# Altium PCB WheelLED_LIght_PcbS.PcbDoc
Units mil, origin at the board's own origin, x right, y up, seen from the top; angles counter-clockwise.
Board outline 1530.68 x 9620.08 mil, 2 copper layers (Top Layer, Bottom Layer); 44 components, 52 nets, 132 pads, 72 vias.
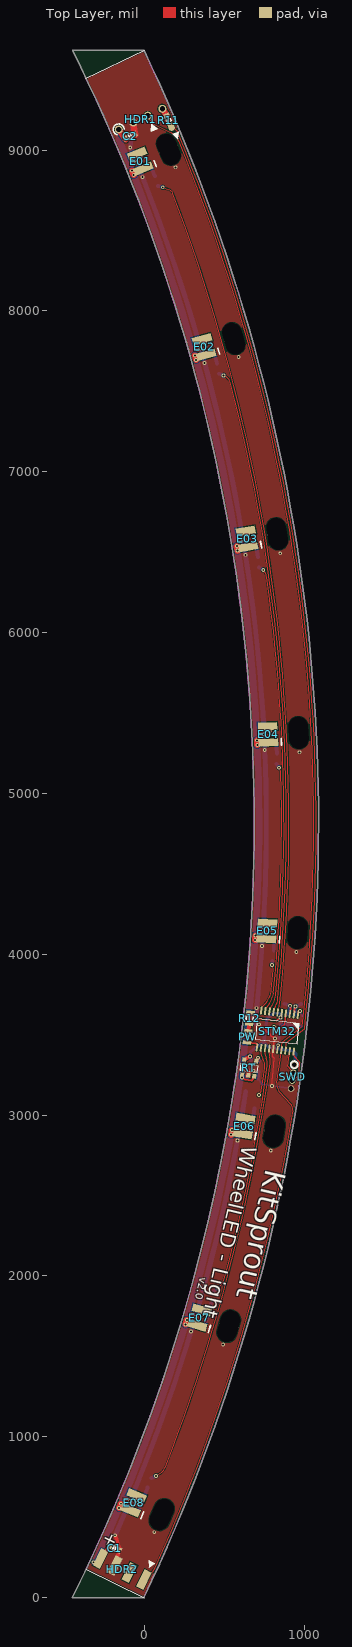
[diagram p0: Top Layer view]
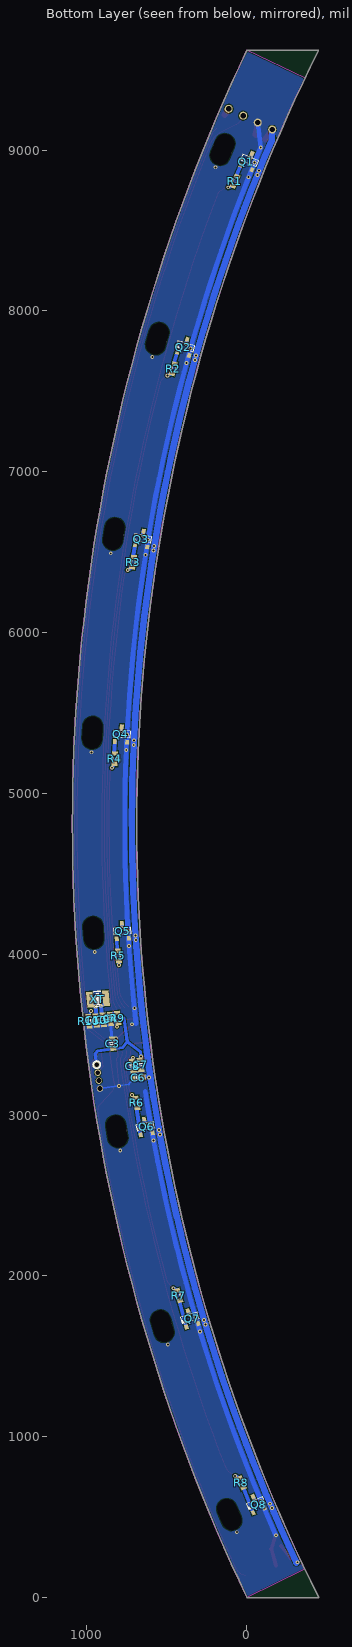
[diagram p1: Bottom Layer view, seen from below]
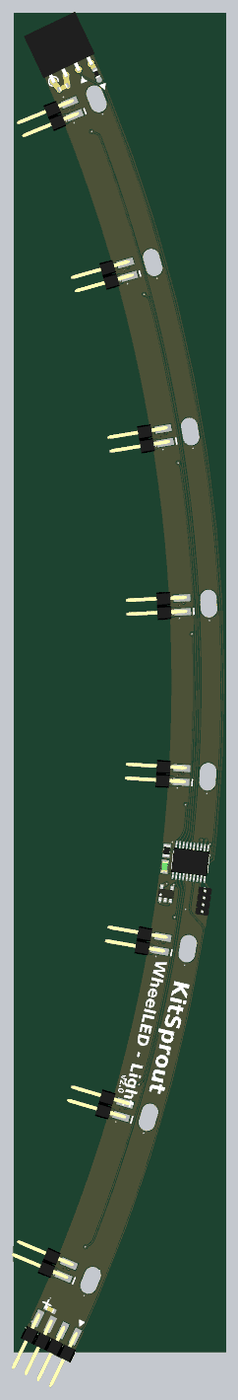
[diagram p2: 3D render of the assembled board from above, using the file's embedded part models]
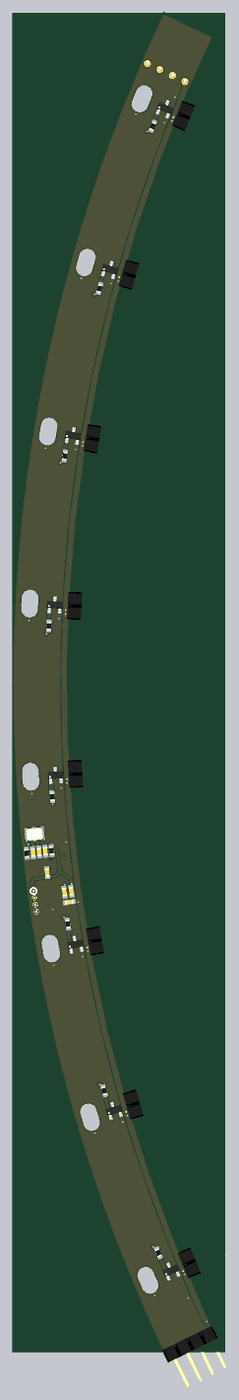
[diagram p3: 3D render of the assembled board from below, using the file's embedded part models]

## Layer stack, top to bottom
Top Solder: solder mask 0.4, Solder Resist, Dk 3.5
Top Layer: signal copper 1.4
Dielectric1: dielectric 12.6, FR-4, Dk 4.8
Bottom Layer: signal copper 1.4
Bottom Solder: solder mask 0.4, Solder Resist, Dk 3.5

## Board outline
-445.33,0 0,0 -0.49,0.23 ccw(c-10114.71,4810.89) 0.21,9620.08 0,9620 -444.55,9620 -444.53,9620.01 cw(c-10114.71,4810.89)

## Design rules (kind name [scope] priority, off if disabled: settings)
Clearance ClearancePolygon [InPolygon] p1: gap=6
Clearance [All] p2: gap=6
ComponentClearance [All] p1: gap=0 collisioncheckmode=3 verticalgap=0 showdistances=FALSE
Height [All] p1: minheight=0 maxheight=5000 prefheight=500
HoleToHoleClearance [All] p1: gap=6 allowstackedmicrovias=TRUE
MinimumSolderMaskSliver [All] p1: minsoldermaskwidth=6
PlaneConnect [All] p1: planeconnectstyle=Direct reliefexpansion=20 reliefentries=4 reliefconductorwidth=20 reliefairgap=10
PolygonConnect [All] p1: connectstyle=Direct reliefconductorwidth=20 reliefentries=4 polygonreliefangle="90 Angle" airgapwidth=10
RoutingVias [All] p1: holewidth=12 width=20 viastyle="Through Hole" minholewidth=12 minwidth=20 maxholewidth=100 maxwidth=200
SilkToSilkClearance [All] p1: silktosilkclearance=0
SilkToSolderMaskClearance SilkscreenOverComponentPads [IsPad] p1: minsilkscreentomaskgap=1 clearancetoexposedcopper=TRUE
SolderMaskExpansion [All] p1: expansion=0
Width [All] p1: maxlimit=30 minlimit=6 preferedwidth=10
23 further rules are at their usual default settings.

## Components (designator, comment, footprint, x,y, rotation, side; value= is the part's Value field where it differs from the comment)
C1 "Cap_0603" CAP_0603 -183.15,307.22 r154 top
C2 "Cap_0603" CAP_0603 -87.14,9086.36 r205.43 top
C3 "Cap_0603" CAP_0603 835.29,3443.88 r262.88 bottom
C4 "Cap_0603" CAP_0603 848.41,3598.13 r83.69 bottom
C6 "Cap_0603" CAP_0603 675.48,3232.65 r171.68 bottom
C7 "Cap_0603" CAP_0603 661.52,3311.8 r82.08 bottom
C8 "Cap_0603" CAP_0603 711.04,3304.91 r82.08 bottom
C9 "Cap_0603" CAP_0603 893.14,3593.18 r263.69 bottom
C10 "Cap_0603" CAP_0603 937.87,3588.23 r263.69 bottom
E01 "HDR1x2_2.54" HDR1X2_2.54_180H -23.75,8931.87 r202.21 top locked
E02 "HDR1x2_2.54" HDR1X2_2.54_180H 374.2,7776.13 r195.79 top locked
E03 "HDR1x2_2.54" HDR1X2_2.54_180H 640.25,6583.1 r189.36 top
E04 "HDR1x2_2.54" HDR1X2_2.54_180H 771.05,5367.78 r182.93 top locked
E05 "HDR1x2_2.54" HDR1X2_2.54_180H 764.96,4145.46 r176.5 top locked
E06 "HDR1x2_2.54" HDR1X2_2.54_180H 622.04,2931.51 r170.07 top locked
E07 "HDR1x2_2.54" HDR1X2_2.54_180H 344.11,1741.19 r163.64 top locked
E08 "HDR1x2_2.54" HDR1X2_2.54_180H -65.35,589.48 r157.21 top locked
HDR1 "HDR1x4_2.54" HDR1X4_2.54_90F -157.26,9128.29 r115.43 top
HDR2 "HDR1x4_2.54" HDR1X4_2.54_180H -1.1,111.8 r244 top
PW "LED_0805" LED_0805_GREEN 644.13,3486.95 r262.98 top
Q1 "BJT_NPN" SOT23-3 -14.49,8935.65 r112.21 bottom
Q2 "BJT_NPN" SOT23-3 383.82,7778.85 r105.79 bottom
Q3 "BJT_NPN" SOT23-3 650.12,6584.72 r99.36 bottom
Q4 "BJT_NPN" SOT23-3 781.04,5368.29 r92.93 bottom
Q5 "BJT_NPN" SOT23-3 774.94,4144.85 r86.5 bottom
Q6 "BJT_NPN" SOT23-3 631.89,2929.78 r80.07 bottom
Q7 "BJT_NPN" SOT23-3 353.7,1738.37 r73.64 bottom
Q8 "BJT_NPN" SOT23-3 -56.13,585.6 r67.21 bottom
R1 "Res_0603" RES_0603 74.74,8806.89 r112.2 bottom
R2 "Res_0603" RES_0603 458.08,7640.91 r104.98 bottom
R3 "Res_0603" RES_0603 708.63,6438.23 r98.55 bottom
R4 "Res_0603" RES_0603 822.77,5216.45 r92.12 bottom
R5 "Res_0603" RES_0603 799.46,3990.13 r85.7 bottom
R6 "Res_0603" RES_0603 686.74,3075.37 r260.88 bottom
R7 "Res_0603" RES_0603 424.81,1877.99 r254.45 bottom
R8 "Res_0603" RES_0603 34.38,713.46 r248.02 bottom
R9 "Res_0603" RES_0603 803.68,3603.08 r263.69 bottom
R10 "Res_0603" RES_0603 982.59,3583.28 r263.69 bottom
R11 "Res_0603" RES_0603 152.4,9184.89 r293.08 top
R12 "Res_0805" RES_0805 657.73,3602.57 r83.6 top
RT "RT9193" SOT23-5 653.92,3293.61 r81.98 top
STM32 "STM32F03xF" TSSOP_E170_P0.65_20 829.71,3522.45 r263.29 top locked
SWD "HDR1x4_1.27" HDR1X4_1.27_180 934.26,3313.33 r352.28 top
XT "XTAL_3225_2P" XT_3225_2 926.68,3721.56 r174.37 bottom

## Footprints (in the part's own frame and the unit in brackets; to place one, negate y for a bottom-side part, rotate by r counter-clockwise, add the part's x,y. Pads: shape width x height; smd on the part's side, far side on the other; paste and mask are expansions set on the pad)
CAP_0603 [mil]
  rect 28x36 smd: 1(-32,0) 2(32,0)
  silkscreen extent -9,-16 10,15, body extent -31,-16 32,16, height 36
HDR1X2_2.54_180H [mil]
  rect 120x50 smd: 1(0,50) 2(0,-50)
  body extent -35,-100 406,100, height 61
HDR1X4_1.27_180 [mil]
  round 40 hole 30: 1(0,0) 2(0,-50) 3(0,-100) 4(0,-150)
  body extent -49,-175 49,25, height 210
HDR1X4_2.54_90F [mil]
  round 50 hole 32: 1(0,0) 2(0,-100) 3(0,-200) 4(0,-300)
  body extent -10,-355 386,55, height 99
HDR1X4_2.54_180H [mil]
  rect 120x50 smd: 1(0,0) 2(0,-100) 3(0,-200) 4(0,-300)
  body extent -35,-350 406,50, height 61
LED_0805_GREEN [mil]
  rect 26x52 smd: 1(-36,0) 2(36,0)
  silkscreen extent -12,-25 12,24, body extent -40,-25 40,25, height 43
RES_0603 [mil]
  rect 28x36 smd: 1(-32,0) 2(32,0)
  silkscreen extent -10,-16 10,16, body extent -31,-16 32,16, height 20
RES_0805 [mil]
  rect 26x52 smd: 1(-36,0) 2(36,0)
  silkscreen extent -12,-25 12,25, body extent -39,-24 39,24, height 24
SOT23-3 [mil]
  rect 30x24 smd: 1(-47,38) 2(-47,-38) 3(47,0)
  silkscreen extent -21,-53 21,53, body extent -55,-57 55,57, height 51
SOT23-5 [mil]
  rect 30x24 smd: 1(-47,38) 2(-47,0) 3(-47,-38) 4(47,-38) 5(47,38)
  silkscreen extent -21,-53 21,53, body extent -55,-57 55,57, height 57
TSSOP_E170_P0.65_20 [mil]
  oval 50x12 smd: 1(-115,115.16) 2(-115,89.57) 3(-115,63.98) 4(-115,38.39) 5(-115,12.8) 6(-115,-12.8) 7(-115,-38.39) 8(-115,-63.98) 9(-115,-89.57) 10(-115,-115.16) 11(115,-115.16) 12(115,-89.57) 13(115,-63.98) 14(115,-38.39) 15(115,-12.8) 16(115,12.8) 17(115,38.39) 18(115,63.98) 19(115,89.57) 20(115,115.16)
  silkscreen extent -65,-130 65,130, body extent -126,-130 126,130, height 42
XT_3225_2 [mil]
  rect 40x100 smd: 1(-50,0) 2(50,0)
  silkscreen extent -24,-49 24,49, body extent -63,-49 63,49, height 41

## Part data
C1 C2 C3 C4 C6 C7 C8 C9 C10: "Capacitor"
E01 E02 E03 E04 E05 E06 E07 E08: library part HDR1x2_2.54T, "Header"
HDR1 HDR2 SWD: "Header"
PW: "LED"
Q1 Q2 Q3 Q4 Q5 Q6 Q7 Q8: "Transistor"
R1 R2 R3 R4 R5 R6 R7 R8 R9 R10 R11 R12: "Resistor"
RT: "Power"
STM32: "MCU"
XT: "Crystal Oscillator"

## Free pads (board coordinates)
  round 120 hole 120 slot 200 at 67.21 deg mask-120: 0(109.82,515.89)
  round 120 hole 120 slot 200 at 112.21 deg mask-120: 0(152.15,9003.7)
  round 120 hole 120 slot 200 at 73.64 deg mask-120: 0(526.42,1687.68)
  round 120 hole 120 slot 200 at 105.79 deg mask-120: 0(557.04,7827.82)
  round 120 hole 120 slot 200 at 80.07 deg mask-120: 0(809.2,2898.75)
  round 120 hole 120 slot 200 at 99.36 deg mask-120: 0(827.72,6613.99)
  round 120 hole 120 slot 200 at 86.5 deg mask-120: 0(954.6,4133.86)
  round 120 hole 120 slot 200 at 92.93 deg mask-120: 0(960.8,5377.49)
  round 40 smd: 2(171.39,9140.05)

## Via types
v1: diameter 24, hole 12, Top Layer to Bottom Layer, 72 vias

## Nets (pads, with @x,y where several pads share a name; then routed paths per layer and width w, separated by ;. In a path a pad name is that pad's centre, name@x,y a point inside that pad or via, vN(x,y) a via of type N, cw(c..) or ccw(c..) an arc to the next point about the centre after c; other vN are vias at no path point)
3V3: C3.2 C4.2 C7.2 R9.1 R12.2 RT.5 STM32.5 STM32.16 SWD.1 | length 993.4
  Top Layer w10: R12.2@661.03,3631.93 679,3629.93 703.08,3599.8 822.83,3586.44 v1(849.47,3607.74)
  Top Layer w24: RT.5 v1(658.71,3365.15)
  Bottom Layer w20: v1(658.71,3365.15) 662.6,3394.33 744.65,3457.11 ; C4.2 R9.1 764.13,3602.01 744.65,3457.11 ; SWD.1 943.33,3380.84 929.53,3398.92 C3.2 772.99,3419.96 744.65,3457.11
  Bottom Layer w24: v1(658.71,3365.15) C7.2 ; C3.2 v1(834.09,3434.33) ; v1(849.47,3607.74) C4.2
BOOT: R10.1 STM32.1 | length 72.7
  Top Layer w12: STM32.1 960.17,3645.74 v1@965.12,3651.44 ; v1@964.56,3649.2 v1@969.52,3648.62
  Bottom Layer w12: R10.1@981.78,3616.81 R10.1
  Bottom Layer w16: v1@969.71,3648.7 R10.1@982.66,3618.61
  other v1: 970.07,3647.91
CP: 
D0: 
D1: 
D2: 
D3: 
D4: 
D5: 
D6: 
D7: 
DSA: 
DSB: 
EXP: PW.2 STM32.11 | length 82.6
  Top Layer w12: PW.2 697.43,3443.91 703.68,3435.84 STM32.11
GND: C1.1 C2.1 C3.1 C4.1 C6.1 C7.1 C8.1 C9.2 C10.2 HDR1.2 HDR2.3 Q1.2 Q2.2 Q3.2 Q4.2 Q5.2 Q6.2 Q7.2 Q8.2 R10.2 RT.2 STM32.15 SWD.4 | length 10091.1
  Top Layer w6: v1@794.22,3181.13 804.54,3272.22 809.88,3353.38 800.55,3364.04 STM32.15
  Top Layer w12: v1(713.85,3565.01) v1(814.03,3475.76) ; STM32.15 v1@809.73,3476.16
  Top Layer w24: HDR2.3 C1.1 -150.29,301.6 v1(-179.91,387.63) ; HDR1.2@-73.75,9180.11 HDR1.2@-71.84,9170.28 ; RT.2 649,3264.6 664.66,3277.59 v1(682.17,3275.95)
  Top Layer w40: HDR1.2@-69.12,9166.73 C2.1@-55.53,9096.55
  Bottom Layer w12: C6.1 734.1,3191.58 SWD.4
  Bottom Layer w20: C3.1 C4.1@849.23,3565.84 ; C4.1 C9.2 C10.2 R10.2
  Bottom Layer w24: C7.1 682.26,3276.6 C8.1 ; C6.1 C8.1@712.17,3272.59 ; v1@713.71,3564.96 v1@713.75,3565.05
  Bottom Layer w30: v1(-179.91,387.63) ccw(c-10114.71,4810.89) 632.27,3147.17 ; HDR1.2 v1(-85.78,9016.37) ; -20.46,8857.09 ccw(c-10114.71,4810.89) v1(-85.78,9016.37) ; 689.3,3570.38 ccw(c-10114.71,4810.89) v1(-85.78,9016.37)
  other v1: 63.18,406.52 -87.61,601.03 492.12,1573.12 292.01,1654.04 319.16,1744.98 787.81,2780.38 580.77,2843.08 597.53,2936.49 794.75,3180.49 699.72,3664.7 946.56,4013.16 733.79,4052.29 740,4146.99 966.35,5255.95 750.55,5271.03 746.12,5365.83 630.81,6483.99 846.95,6493.16 615.8,6577.7 376.1,7675.93 588.59,7713.9 350.7,7767.37 -10.4,8831.89 196.51,8893.39 -47.67,8924.3
LED_1: R1.1 STM32.6 | length 5301.4
  Top Layer w6: v1@110.47,8771.85 v1(116.34,8768.98) 154.21,8754.27 cw(c141.37,8715.98) 179.56,8729.13 ; 179.79,8729.22 cw(c-10114.71,4810.89) 843.7,3695.77 ; STM32.6 cw(c852.07,3645.6) STM32.6@831.51,3655.63 ; STM32.6@831.65,3652.03 ccw(c682.93,3716.57) 843.71,3695.77
  Bottom Layer w24: R1.1 v1(116.34,8768.98)
LED_2: R2.1 STM32.7 | length 4028.3
  Top Layer w6: v1@495.22,7599.71 cw(c455.65,7519.94) 537.24,7555.62 ; 537.34,7555.66 cw(c-10114.71,4810.89) 831.43,3723.7 ; STM32.7@807.19,3656.19 ccw(c671.2,3744.45) 831.98,3723.65
  Bottom Layer w24: R2.1 v1(495,7599.24)
LED_3: R3.1 STM32.8 | length 2783
  Top Layer w6: v1@741.21,6389.87 cw(c678.62,6332.05) 762.92,6344.48 ; 762.71,6344.45 cw(c-10114.71,4810.89) 818.6,3746.57 ; STM32.8@780.65,3661.15 ccw(c658.15,3767.34) 818.93,3746.54
  Bottom Layer w24: R3.1 v1(741.07,6389.74)
LED_4: R4.1 STM32.9 | length 1542.2
  Top Layer w6: STM32.9@756.28,3664.97 ccw(c644.69,3782.57) 804.89,3757.7 ; 804.62,3757.73 ccw(c-10114.71,4810.89) 850.6,5131.55 ; v1@839.98,5160.12 cw(c797.81,5127.93) 850.74,5131.55
  Bottom Layer w24: R4.1 v1(839.73,5159.93)
LED_5: R5.1 STM32.10 | length 300.1
  Top Layer w6: STM32.10@732.93,3671.26 ccw(c630.48,3796.91) 791.74,3780.26 ; 791.7,3780.26 ccw(c-10114.71,4810.89) 802.75,3904.74 ; v1@796.09,3925.89 cw(c772.5,3906.3) 803.12,3904.71
  Bottom Layer w24: v1(795.03,3933.11) R5.1
LED_6: R6.1 STM32.12 | length 286.8
  Top Layer w6: v1@714.17,3123.98 ccw(c662.62,3168.85) 729.66,3155.54 ccw(c-10114.71,4810.89) 749.86,3293.69 ; STM32.12@726.87,3400.51 ccw(c804.85,3389.43) 738.43,3347.09 cw(c672.02,3304.75) 750,3293.67
  other v1: 714.8,3124.71
LED_7: R7.1 STM32.13 | length 1550.2
  Top Layer w6: v1@457.33,1924.65 ccw(c403.37,2008.85) 499.72,1982.05 ; 499.79,1982.03 ccw(c-10114.71,4810.89) 766.82,3306.73 ; STM32.13@751.2,3400.33 ccw(c829.18,3389.25) 758.98,3353.53 cw(c688.79,3317.82) 766.76,3306.74
  Bottom Layer w24: R7.1 v1(458.1,1923.45)
LED_8: R8.1 STM32.14 | length 2788.5
  Top Layer w6: v1(73.22,756.62) 94.47,768.45 ccw(c52.75,843.87) 130.23,806.09 ; 130.34,806.04 ccw(c-10114.71,4810.89) 784.32,3323.92 ccw(c706.34,3335) 780.91,3360.37 cw(c855.47,3385.73) STM32.14@777.49,3396.81
  Bottom Layer w24: R8.1 v1(73.22,756.62)
MR: 
NetC8_2: C8.2 RT.4 | length 45.6
  Top Layer w24: RT.4 v1(709.36,3356.73)
  Bottom Layer w24: v1(709.36,3356.73) C8.2
NetE01_2: E01.2 Q1.3 | length 55.7
  Top Layer w24: E01.2@-32.26,8979.16 v1(-21.74,8953.35)
  Bottom Layer w24: Q1.3 v1(-21.74,8953.35)
NetE02_2: E02.2 Q2.3 | length 55.7
  Top Layer w24: E02.2@371.04,7824.08 v1(378.61,7797.25)
  Bottom Layer w24: Q2.3 v1(378.61,7797.25)
NetE03_2: E03.2 Q3.3 | length 55.7
  Top Layer w24: E03.2@642.48,6631.1 v1(646.99,6603.59)
  Bottom Layer w24: Q3.3 v1(646.99,6603.59)
NetE04_2: E04.2 Q4.3 | length 55.7
  Top Layer w24: E04.2@778.64,5415.23 v1(780.04,5387.39)
  Bottom Layer w24: Q4.3 v1(780.04,5387.39)
NetE05_2: E05.2 Q5.3 | length 55.7
  Top Layer w24: v1(776.09,4163.94) E05.2@777.81,4191.76
  Bottom Layer w24: v1(776.09,4163.94) Q5.3
NetE06_2: E06.2 Q6.3 | length 55.7
  Top Layer w24: v1(635.17,2948.63) E06.2@640,2976.08
  Bottom Layer w24: v1(635.17,2948.63) Q6.3
NetE07_2: E07.2 Q7.3 | length 55.7
  Top Layer w24: v1(359.07,1756.73) E07.2@366.94,1783.47
  Bottom Layer w24: v1(359.07,1756.73) Q7.3
NetE08_2: E08.2 Q8.3 | length 55.7
  Top Layer w24: v1(-48.74,603.24) E08.2@-37.93,628.93
  Bottom Layer w24: v1(-48.74,603.24) Q8.3
NetHDR1_4: HDR1.4 R11.1 | length 43.3
  Top Layer w40: HDR1.4 R11.1@137,9220.66
NetPW_1: PW.1 R12.1 | length 42
  Top Layer w24: PW.1 R12.1@653.44,3564.42
NetQ1_1: Q1.1 R1.2 | length 73.1
  Bottom Layer w24: Q1.1@38.77,8905.72 R1.2@67.29,8838.38
NetQ2_1: Q2.1 R2.2 | length 73.2
  Bottom Layer w24: Q2.1@433.38,7743.24 R2.2@454.63,7673.15
NetQ3_1: Q3.1 R3.2 | length 73.4
  Bottom Layer w24: Q3.1@695.52,6542.79 R3.2@708.81,6470.65
NetQ4_1: Q4.1 R4.2 | length 74
  Bottom Layer w24: Q4.1@821.42,5322.42 R4.2@826.57,5248.65
NetQ5_1: Q5.1 R5.2 | length 73.6
  Bottom Layer w24: R5.2@806.85,4021.7 Q5.1@809.97,4095.2
NetQ6_1: Q6.1 R6.2 | length 168
  Bottom Layer w24: Q6.1 R6.2@686.61,3042.99
NetQ7_1: Q7.1 R7.2 | length 168.1
  Bottom Layer w24: Q7.1@376.89,1682.45 R7.2@420.74,1844.7
NetQ8_1: Q8.1 R8.2 | length 168
  Bottom Layer w24: Q8.1 R8.2
RST: R9.2 STM32.4 | length 141.1
  Top Layer w10: v1(807.67,3549.3) 848.5,3544.75 873.78,3564.95 STM32.4
RX: pad.2 R11.2 STM32.18 | length 5918.3
  Top Layer w6: pad.2@185.35,9137.84 cw(c144.09,9074.34) 212.98,9105.79 ; 212.85,9105.72 cw(c-10114.71,4810.89) 997.66,3538.31 885.1,3448.34 STM32.18
SWCLK: STM32.20 SWD.3 | length 214.7
  Top Layer w6: SWD.3 960.69,3246.1 969.54,3325.41 928.6,3376.62 STM32.20
SWDIO: STM32.19 SWD.2 | length 146
  Top Layer w6: STM32.19 894.84,3304.7 SWD.2
TX: HDR1.3 HDR2.1 STM32.17 | length 9553.2
  Top Layer w6: HDR2.1@11.94,135.16 ccw(c-20.61,229.71) 69.27,185.87 ccw(c-10114.71,4810.89) 925.33,3015.98 ; HDR1.3@24.57,9210.66 ccw(c119.12,9243.21) 75.29,9153.33 168.67,9107.79 cw(c124.83,9017.91) 217.01,9056.67 ; 215.43,9060.23 cw(c-10114.71,4810.89) 984.29,3553.54 860.01,3454.2 STM32.17 ; STM32.17@854.65,3405.68 cw(c-10114.71,4810.89) 826.35,3200.13 ccw(c902.17,3191.25) 838.91,3148.53 913.19,3067.52 cw(c849.93,3024.8) 925.74,3015.93
VCC: 
VIN: C1.2 C2.2 C6.2 E01.1 E02.1 E03.1 E04.1 E05.1 E06.1 E07.1 E08.1 HDR1.1 HDR2.4 RT.1 RT.3 | length 10785.5
  Top Layer w12: RT.1@602.26,3239.42 628.18,3220.38 667.75,3214.52 686.79,3240.44 RT.3@688.18,3242.33
  Top Layer w24: HDR2.4 C1.2 ; HDR1.1@-164.06,9137.17 HDR1.1@-157.39,9128.2
  Top Layer w40: HDR1.1@-156,9124.19 C2.2@-114.66,9068.61 ; v1(-154.9,557.53) -149.24,570.83 v1(-143.8,583.62) ; v1(-75.08,8872.26) -69.89,8859.37 v1(-64.49,8845.96) ; v1(258.5,1698.78) 262.83,1713.28 v1(266.62,1725.94) ; v1(316.34,7723.29) 320.24,7709.25 v1(323.93,7695.97) ; v1(541.6,2879.11) 544.41,2894.67 v1(546.63,2907.02) ; v1(576.73,6537.74) 579.14,6522.67 v1(581.21,6509.74) ; v1(691.16,4088.43) 691.93,4100.14 v1(693.02,4116.72) ; v1(702.81,5330.49) 703.56,5314.57 v1(704.14,5302.17)
  Bottom Layer w24: 601.27,3243.53 611.17,3242.08 C6.2
  Bottom Layer w40: v1@-307.54,216.52 ccw(c-10114.71,4810.89) -154.41,9063.08 HDR1.1 ; 578.93,3097.72 ccw(c-10114.71,4810.89) 601.27,3243.53 ; 578.93,3097.72 ccw(c-10114.71,4810.89) 601.27,3243.53 ; 578.93,3097.72 ccw(c-10114.71,4810.89) 601.27,3243.53 ; 578.93,3097.72 ccw(c-10114.71,4810.89) 601.27,3243.53 ; 578.93,3097.72 ccw(c-10114.71,4810.89) 601.27,3243.53 ; 578.93,3097.72 ccw(c-10114.71,4810.89) 601.27,3243.53 ; 601.27,3243.53 ccw(c-10114.71,4810.89) 607.2,3284.61 ; 601.27,3243.53 ccw(c-10114.71,4810.89) 607.2,3284.61 ; 601.27,3243.53 ccw(c-10114.71,4810.89) 607.2,3284.61 ; 601.27,3243.53 ccw(c-10114.71,4810.89) 607.2,3284.61
  other v1: -314.18,219.63 609.79,3232.71
XIN: C10.1 STM32.2 XT.1 | length 143.4
  Top Layer w12: STM32.2 937.54,3672.39 v1(942.14,3676.02)
  Bottom Layer w24: C10.1@935.65,3620.87 v1(942.14,3676.02) XT.1@974.78,3690.07
XOUT: C9.1 STM32.3 XT.2 | length 143.4
  Top Layer w12: STM32.3 911.94,3673.79 v1(907.33,3679.64)
  Bottom Layer w24: XT.2@874.31,3692.79 v1(907.33,3679.64) C9.1@900.84,3624.49
pads on no net: HDR2.2

## Polygon pours and split planes (outlines as drawn)
GND on Top Layer "Top-GND" (solid, remove dead copper, pour order 4): -359.99,175.67 ccw(c-10114.71,4810.89) -361.04,9448.33 0.21,9620.08 cw(c-10114.71,4810.89) -0.46,0.28 0,0
GND on Bottom Layer "Bottom-GND" (solid, remove dead copper, pour order 6): -359.99,175.67 ccw(c-10114.71,4810.89) -361.04,9448.33 0.21,9620.08 cw(c-10114.71,4810.89) -0.46,0.28 0,0

## Keep-outs
Keep-Out Layer:
  lines w2: -359.99,175.67 ccw(c-10114.71,4810.89) -361.04,9448.33 0.21,9620.08 cw(c-10114.71,4810.89) -0.46,0.28 ; -359.52,175.35 0,0

## Silkscreen, mask and mechanical layers (free items; w line width, h text height)
Top Overlay:
  circle w10: c934.26,3313.33 r22.8
  region: 80.62,9132.11 43.19,9117.98 48.23,9161.48
  region: 178.22,9101.33 215.64,9115.45 210.61,9071.95
  region: 29.22,230.74 65.67,214.26 31.35,187.06
  lines w6: -361,9448.34 0.21,9620.08 ; -359.52,175.35 0,0 ; 29.22,230.74 65.67,214.26 31.35,187.06 29.22,230.74 ; 43.19,9117.98 80.62,9132.11 48.23,9161.48 43.19,9117.98 ; 178.22,9101.33 210.61,9071.95 215.64,9115.45 178.22,9101.33
  lines w10: -168.29,9095.4 cw(c-157.26,9128.29) -122.59,9129.5 ; -20.72,489.81 -1.96,533.9 ; 62.17,8932.95 76.5,8897.4 ; 399.42,1646.49 413.13,1692.4 ; 459.53,7768.21 469.78,7731.31 ; 688.34,2847.64 695.97,2890.08 ; 724.04,6566.38 730.85,6523.81 ; 840.18,4068.86 843.01,4111.89 ; 852.41,5342.47 854.41,5299.4
  text "WheelLED - Light" at 582.02,2822.33 h160 r256.86
  text "KitSprout" at 717.5,2679.03 h220 r256.86
  text "v2.0" at 335.23,1996.99 h80 r256.86
  text "+" at -270.22,345.23 h80 r334
Bottom Overlay:
  circle w10: c934.26,3313.33 r22.8
Mechanical 1:
  lines w2: -445.4,0.03 ccw(c-10114.71,4810.89) -444.53,9620.01 ; -445.33,0 0,0 ; -444.55,9620 0,9620 ; -0.49,0.23 ccw(c-10114.71,4810.89) 0.21,9620.08
Mechanical 4:
  lines w2: 45.28,543 174.36,488.78 ; 87.34,8977.24 216.95,9030.17 ; 459.25,1707.4 593.58,1667.97 ; 489.68,7808.77 624.4,7846.86 ; 740.24,2910.82 878.15,2886.68 ; 758.65,6602.61 896.79,6625.37 ; 884.73,4138.13 1024.47,4129.59 ; 890.89,5373.91 1030.71,5381.06
  lines w10: -147.09,-50.65 ccw(c-10114.71,4810.89) -99.13,9572.85
Mechanical 13:
  circle w5: c109.82,515.89 r130.98
  circle w5: c526.42,1687.68 r130.98
  circle w5: c809.2,2898.75 r130.98
  circle w5: c954.6,4133.86 r130.98
  circle w5: c960.8,5377.49 r130.98
  circle w5: c827.72,6613.99 r130.98
  circle w5: c557.04,7827.82 r130.98
  circle w5: c152.15,9003.7 r130.98
Mechanical 14:
  lines w2: -361.04,9448.33 0.21,9620.08